# EAGLE board Sensor8535 - eagle (EAGLE 4.09)
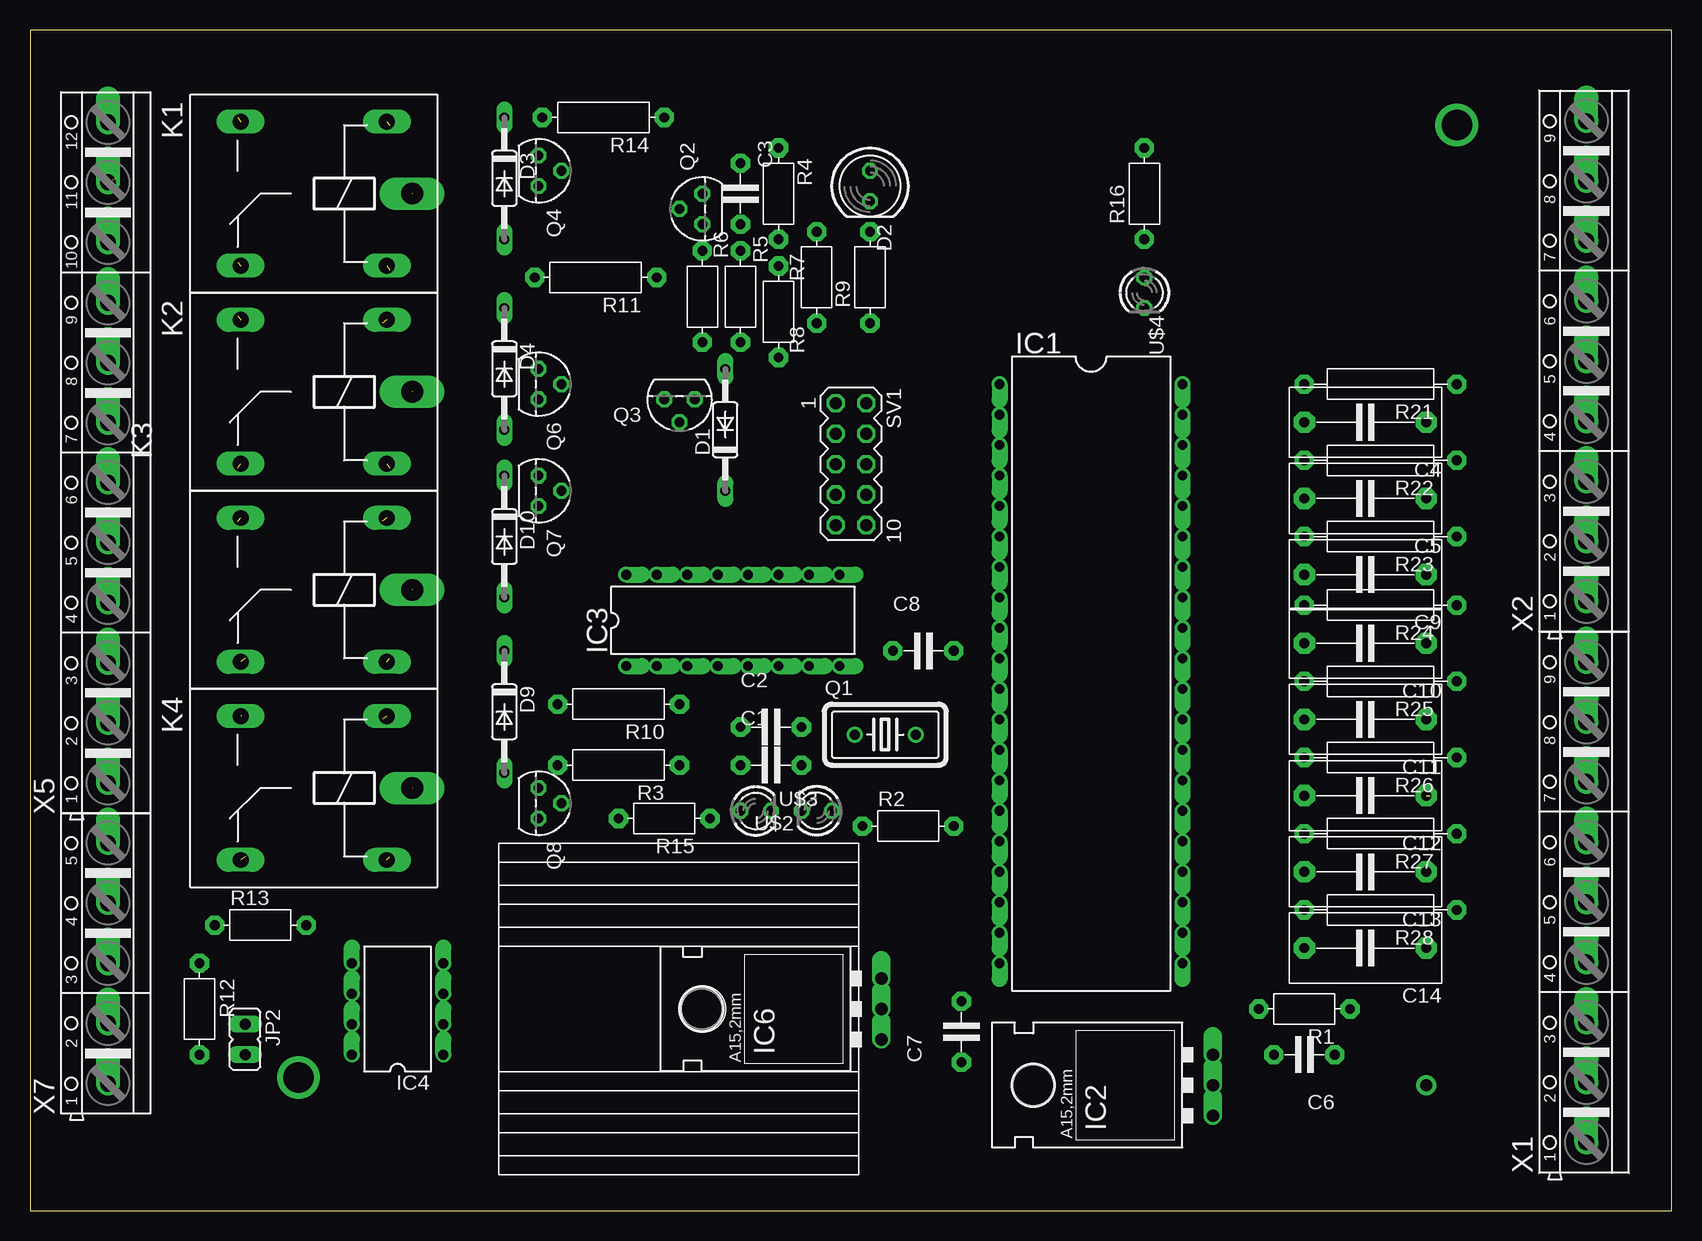
[diagram p0: board, top side]
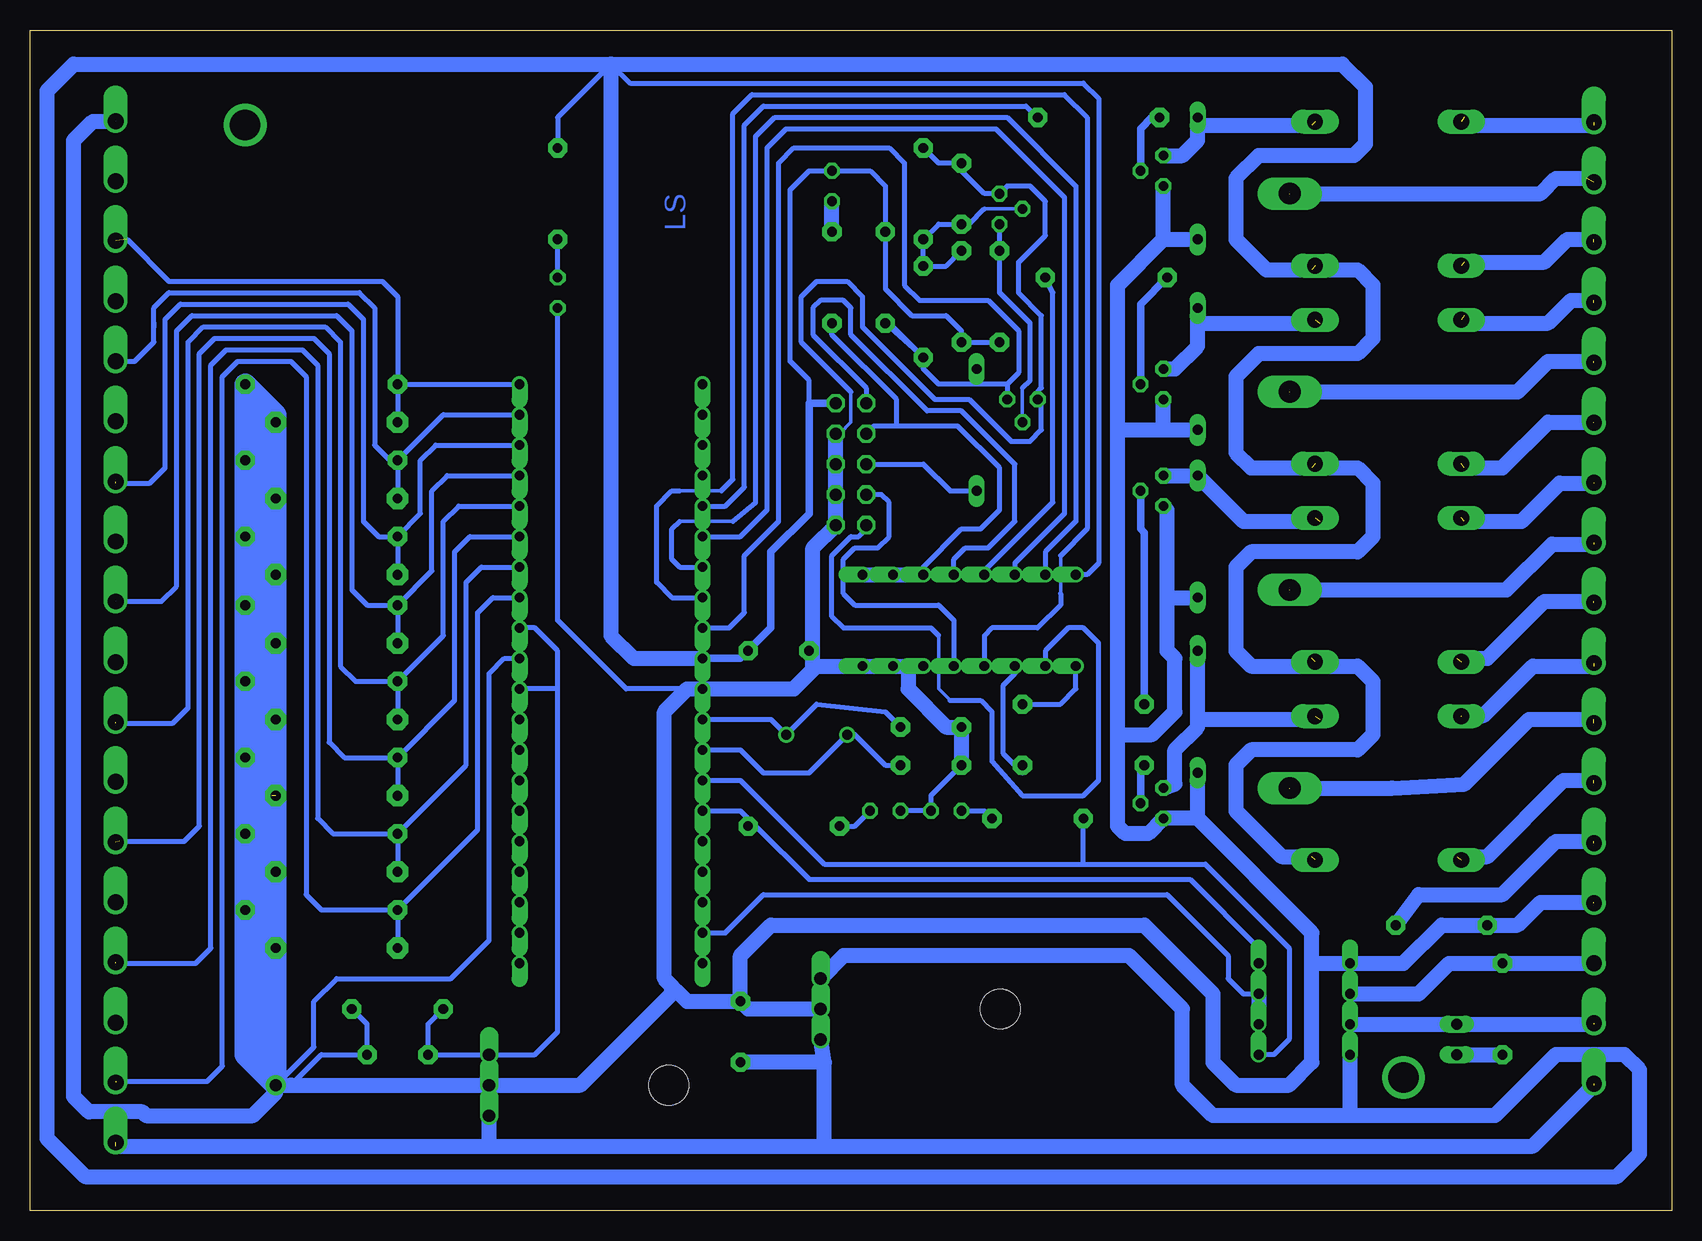
[diagram p1: board, bottom side, seen from below]

Size 136.83 x 98.41 mm. Coordinates in mm from the lower left corner, seen from the top.
Outline: 136.83,0 136.83,98.4 0,98.4 0,0 136.83,0
Copper layers used: Bottom

## Footprints (pad centres in the part's own frame; a part is rotated, then mirrored left to right if it is on the bottom)
C-5 = drill 0.813 pad 1.6 octagon: 1 -2.54,0; 2 2.54,0
C-10 = drill 0.813 pad 1.778 octagon: 1 -5.08,0; 2 5.08,0
DO35-10 = drill 0.813 long: A 5.08,0; C -5.08,0
LED5MM = drill 0.813 octagon: A -1.27,0; K 1.27,0
DIL40 = drill 0.813 offset: 1 -24.13,-7.62; 2 -21.59,-7.62; 3 -19.05,-7.62; 4 -16.51,-7.62; 5 -13.97,-7.62; 6 -11.43,-7.62; 7 -8.89,-7.62; 8 -6.35,-7.62; 9 -3.81,-7.62; 10 -1.27,-7.62; 11 1.27,-7.62; 12 3.81,-7.62; 13 6.35,-7.62; 14 8.89,-7.62; 15 11.43,-7.62; 16 13.97,-7.62; 17 16.51,-7.62; 18 19.05,-7.62; 19 21.59,-7.62; 20 24.13,-7.62; 21 24.13,7.62; 22 21.59,7.62; 23 19.05,7.62; 24 16.51,7.62; 25 13.97,7.62; 26 11.43,7.62; 27 8.89,7.62; 28 6.35,7.62; 29 3.81,7.62; 30 1.27,7.62; 31 -1.27,7.62; 32 -3.81,7.62; 33 -6.35,7.62; 34 -8.89,7.62; 35 -11.43,7.62; 36 -13.97,7.62; 37 -16.51,7.62; 38 -19.05,7.62; 39 -21.59,7.62; 40 -24.13,7.62
78XXL = drill 1.016 offset: GND 0,-3.81; IN -2.54,-3.81; OUT 2.54,-3.81 | hole 3.302: 0,11.176
DIL16 = drill 0.813 offset: 1 -8.89,-3.81; 2 -6.35,-3.81; 3 -3.81,-3.81; 4 -1.27,-3.81; 5 1.27,-3.81; 6 3.81,-3.81; 7 6.35,-3.81; 8 8.89,-3.81; 9 8.89,3.81; 10 6.35,3.81; 11 3.81,3.81; 12 1.27,3.81; 13 -1.27,3.81; 14 -3.81,3.81; 15 -6.35,3.81; 16 -8.89,3.81
DIL08 = drill 0.813 offset: 1 -3.81,-3.81; 2 -1.27,-3.81; 3 1.27,-3.81; 4 3.81,-3.81; 5 3.81,3.81; 6 1.27,3.81; 7 -1.27,3.81; 8 -3.81,3.81
JP1 = drill 0.914 long: 1 0,-1.27; 2 0,1.27
ZF112 = drill 1.321 long: 1 -6.096,5.994; 2 -6.096,-5.994; O 6.096,5.994; S 6.096,-5.994 | drill 1.803 long: P -8.204,0
HC18U-V = drill 0.813 round: 1 -2.54,0; 2 2.54,0
TO92 = drill 0.813 octagon: 1 1.27,0; 2 0,1.905; 3 -1.27,0
R-7,5 = drill 0.813 pad 1.6 octagon: 1 -3.81,0; 2 3.81,0
R-10 = drill 0.813 pad 1.6 octagon: 1 -5.08,0; 2 5.08,0
R-12,5 = drill 0.813 pad 1.6 octagon: 1 -6.35,0; 2 6.35,0
MA05-2 = drill 1.016 octagon: 1 -5.08,-1.27; 2 -5.08,1.27; 3 -2.54,-1.27; 4 -2.54,1.27; 5 0,-1.27; 6 0,1.27; 7 2.54,-1.27; 8 2.54,1.27; 9 5.08,-1.27; 10 5.08,1.27
LED3MM = drill 0.813 octagon: A -1.27,0; K 1.27,0
AK500/9 = drill 1.321 offset: 1 -20.015,0; 2 -15.011,0; 3 -10.033,0; 4 -5.004,0; 5 0,0; 6 5.004,0; 7 10.033,0; 8 15.011,0; 9 20.015,0
AK500/12 = drill 1.321 offset: 1 -27.534,0; 2 -22.53,0; 3 -17.526,0; 4 -12.497,0; 5 -7.493,0; 6 -2.489,0; 7 2.489,0; 8 7.493,0; 9 12.497,0; 10 17.526,0; 11 22.53,0; 12 27.534,0
AK500/5 = drill 1.321 offset: 1 -10.033,0; 2 -5.004,0; 3 0,0; 4 5.004,0; 5 10.008,0

## Placement (x,y rotation side)
C1  27pF  [C-5]  61.75,37.14 0 top
C2  27pF  [C-5]  61.75,40.32 0 top
C3  100nF  [C-5]  59.21,84.77 270 top
C4  [C-10]  111.28,65.72 180 top
C5  [C-10]  111.28,59.37 180 top
C6  100nF  [C-5]  106.2,13.01 180 top
C7  10uFx25V  [C-5]  77.62,14.92 90 top
C8  470nF  [C-5]  74.45,46.67 0 top
C9  [C-10]  111.28,53.02 180 top
C10  [C-10]  111.28,47.3 180 top
C11  [C-10]  111.28,40.95 180 top
C12  [C-10]  111.28,34.6 180 top
C13  [C-10]  111.28,28.25 180 top
C14  [C-10]  111.28,21.9 180 top
D1  1N4148  [DO35-10]  57.94,65.08 90 top
D2  [LED5MM]  70,85.4 270 top
D3  1N4148  [DO35-10]  39.52,86.04 270 top
D4  1N4148  [DO35-10]  39.52,70.16 270 top
D9  1N4148  [DO35-10]  39.52,41.59 270 top
D10  1N4148  [DO35-10]  39.52,56.19 270 top
IC1  AT90S8535P  [DIL40]  88.42,44.76 270 top
IC2  LM78T05  [78XXL]  94.77,10.47 90 top
IC3  4053N  [DIL16]  58.57,49.21 0 top
IC4  MAX481CPA  [DIL08]  30.63,16.82 90 top
IC6  LM340T05  [78XXL]  67.14,16.82 90 top
JP2  [JP1]  17.93,14.28 180 top
K1  ZF112  [ZF112]  23.65,84.77 180 top
K2  ZF112  [ZF112]  23.65,68.26 180 top
K3  ZF112  [ZF112]  23.65,51.75 180 top
K4  ZF112  [ZF112]  23.65,35.24 180 top
Q1  4MHz  [HC18U-V]  71.27,39.68 0 top
Q2  BC337  [TO92]  56.03,83.5 90 top
Q3  BC337  [TO92]  54.13,67.62 180 top
Q4  BC337  [TO92]  42.38,86.67 270 top
Q6  BC337  [TO92]  42.38,68.89 270 top
Q7  BC337  [TO92]  42.38,60 270 top
Q8  BC337  [TO92]  42.38,33.97 270 top
R1  470  [R-7,5]  106.2,16.82 180 top
R2  470  [R-7,5]  73.18,32.06 0 top
R3  [R-10]  49.05,37.14 180 top
R4  6.8k  [R-7,5]  62.38,84.77 90 top
R5  43k  [R-7,5]  59.21,76.19 270 top
R6  10k  [R-7,5]  56.03,76.19 270 top
R7  1M  [R-7,5]  62.38,74.93 90 top
R8  10k  [R-7,5]  65.56,77.78 90 top
R9  150  [R-7,5]  70,77.78 90 top
R10  [R-10]  49.05,42.22 180 top
R11  [R-10]  47.14,77.78 180 top
R12  120  [R-7,5]  14.12,16.82 270 top
R13  100  [R-7,5]  19.2,23.81 0 top
R14  [R-10]  47.78,91.12 180 top
R15  470  [R-7,5]  52.86,32.7 180 top
R16  470  [R-7,5]  92.86,84.77 90 top
R21  [R-12,5]  112.55,68.89 180 top
R22  [R-12,5]  112.55,62.54 180 top
R23  [R-12,5]  112.55,56.19 180 top
R24  [R-12,5]  112.55,50.48 180 top
R25  [R-12,5]  112.55,44.13 180 top
R26  [R-12,5]  112.55,37.78 180 top
R27  [R-12,5]  112.55,31.43 180 top
R28  [R-12,5]  112.55,25.08 180 top
SV1  ISP  [MA05-2]  68.41,62.23 270 top
U$1  [TO-220]  56.03,16.82 90 top
U$2  [LED3MM]  65.56,33.33 180 top
U$3  [LED3MM]  60.48,33.33 0 top
U$4  [LED3MM]  92.86,76.51 270 top
X1  [AK500/9]  129.69,25.71 90 top
X2  [AK500/9]  129.69,70.8 90 top
X5  [AK500/12]  6.5,63.18 90 top
X7  [AK500/5]  6.5,20.63 90 top

## Library data of the parts
C1-C14 R1-R16 R21-R28 = discrete
D1 D3 D4 D9 D10 = diode
D2 U$2-U$4 = led
IC1 = atmel
IC2 IC6 = v-reg
IC3 = 40xx
IC4 = maxim
JP2 = jumper
K1-K4 = relay
Q1 = crystal
Q2-Q4 Q6-Q8 = transistor-npn
SV1 = con-lstb
U$1 = heatsink_brazil
X1 X2 X5 X7 = con-ptr500

## Nets
(MISO)PB6: IC1.7 IC3.15
(MOSI)PB5: IC1.6 IC3.14
(SCK)PB7: IC1.8 IC3.4
+5V: C8.2 D2.A IC1.10 IC3.16 IC4.8 IC6.OUT K1.1 K2.1 K3.1 K4.1 R5.2 R6.2 R8.2 R16.2 SV1.2
A: IC4.6 R12.1 X7.3
ADC0: C4.2 IC1.40 R21.2 X2.7
ADC1: C5.2 IC1.39 R22.2 X2.5
ADC2: C9.2 IC1.38 R23.2 X2.3
ADC3: C10.2 IC1.37 R24.2 X2.1
ADC4: C11.2 IC1.36 R25.2 X1.8
ADC5: C12.2 IC1.35 R26.2 X1.6
ADC6: C13.2 IC1.34 R27.2 X1.4
ADC7: C14.2 IC1.33 R28.2 X1.2
AVCC: C6.2 IC1.30 IC1.32 IC2.OUT R1.2
B: IC4.7 JP2.1 X7.2
CLK1: C1.2 IC1.13 Q1.1
CLK2: C2.2 IC1.12 Q1.2
LED_ENABLE: IC3.9 IC3.10 IC3.11 R9.1 SV1.3
MISO: IC3.2 SV1.9
MOSI: IC3.12 SV1.1
N$1: R13.2 X7.5
N$3: K1.O X5.10
N$4: D3.C K1.2 Q4.3
N$5: D2.K R9.2
N$6: K2.O X5.7
N$7: Q2.3 Q3.2 R6.1
N$8: D4.C K2.2 Q6.3
N$9: C3.2 Q2.2 R4.1 R5.1 R7.2
N$11: JP2.2 R12.2
N$12: D10.C K3.2 Q7.3
N$13: D9.C K4.2 Q8.3
N$14: K3.O X5.4
N$15: Q4.2 R14.2
N$16: Q6.2 R11.2
N$19: Q7.2 R10.2
N$20: Q8.2 R3.2
N$21: K1.S X5.12
N$22: K2.S X5.9
N$23: K3.S X5.6
N$24: K4.S X5.3
N$25: K4.O X5.1
N$26: K4.P X5.2
N$27: K3.P X5.5
N$28: K2.P X5.8
N$29: K1.P X5.11
N$33: R15.1 U$3.A
N$34: R2.1 U$2.A
N$36: R16.1 U$4.A
P-RESET: D1.C SV1.5
PB0: IC1.1
PB1: IC1.2
PB2: IC1.3
PB3: IC1.4
PB4: IC1.5 R14.1
PB5: IC3.13 R11.1
PB6: IC3.1 R10.1
PB7: IC3.3 R3.1
PD0: IC1.14 IC4.1 R15.2
PD1: IC1.15 IC4.4 R2.2
PD2: IC1.16
PD3: IC1.17
PD4: IC1.18
PD5: IC1.19 IC4.2 IC4.3
PD6: IC1.20
PD7: IC1.21
PE: C1.1 C2.1 C3.1 C4.1 C5.1 C6.1 C7.2 C8.1 C9.1 C10.1 C11.1 C12.1 C13.1 C14.1 D3.A D4.A D9.A D10.A IC1.11 IC1.31 IC2.GND IC3.6 IC3.7 IC3.8 IC4.5 IC6.GND Q2.1 Q3.1 Q4.1 Q6.1 Q7.1 Q8.1 R1.1 R4.2 R13.1 R21.1 R22.1 R23.1 R24.1 R25.1 R26.1 R27.1 R28.1 SV1.4 SV1.6 SV1.8 SV1.10 U$2.K U$3.K U$4.K X2.9 X7.4
RST: D1.A IC1.9 Q3.3 R7.1 R8.1
SCK: IC3.5 SV1.7
VCC: C7.1 IC2.IN IC6.IN X1.1 X7.1

## Tracks (layer width: path | path; a pad name or v marks a point on that pad's centre or on a via)
(MISO)PB6
  Bottom 0.305: 82.7,57.46 78.26,57.46
  Bottom 0.406: IC1.7 82.7,53.65 83.34,54.29 83.34,56.83 82.7,57.46 | 78.26,57.46 76.35,59.05 76.35,89.53 74.77,91.12 55.4,91.12 49.68,85.4 49.68,57.46 52.22,54.92 IC3.15
(MOSI)PB5
  Bottom 0.406: IC1.6 77.62,56.19 75.4,58.41 75.4,88.58 73.81,90.16 56.35,90.16 50.64,84.45 50.64,58.1 54.76,53.97 IC3.14
(SCK)PB7
  Bottom 0.305: 82.7,60 79.21,60 | 50.95,54.6 50.95,51.43
  Bottom 0.406: IC1.8 83.34,51.11 84.61,52.38 84.61,58.73 83.34,60 82.7,60 | IC3.4 57.3,47.94 56.67,48.57 52.86,48.57 50.95,50.48 50.95,51.43 | 50.95,54.6 48.73,56.83 48.73,91.12 50.64,93.02 76.67,93.02 78.26,91.43 78.26,60.96 79.21,60
+5V  (4 unrouted)
  Bottom 0.406: R6.2 R5.2 59.21,73.34 60.48,74.61 63.34,74.61 65.56,76.83 R8.2 65.56,85.4 66.83,86.67 D2.A 71.91,86.67 73.5,85.08 73.5,70.8 71.91,69.21 71.91,67.3 | IC3.16 48.73,53.02 47.78,53.97 47.78,92.71 49.05,93.97 86.83,93.97 88.42,95.56 92.86,91.12 R16.2
  Bottom 0.61: IC1.10 77.62,46.03 | 77.62,46.03 75.08,48.57 75.08,54.92 71.91,58.1 71.91,67.3 SV1.2 | 77.62,46.03 C8.2
  Bottom 1.27: 29.36,46.03 30,46.03 30.63,45.4 | 30,61.91 31.27,61.91 | 30,78.42 30.63,78.42 | 30,29.52 32.54,29.52 36.35,33.33 36.35,37.14 35.08,38.41 26.19,38.41 24.92,39.68 24.92,44.13 26.19,45.4 30.63,45.4 | 30.63,45.4 35.08,45.4 36.35,46.67 36.35,53.65 35.08,54.92 26.19,54.92 24.92,56.19 24.92,60.64 26.19,61.91 30,61.91 | 30,61.91 35.08,61.91 36.35,63.18 36.35,69.53 34.44,71.43 26.19,71.43 24.92,72.7 24.92,77.15 26.19,78.42 30,78.42 | 30,78.42 33.81,78.42 36.35,80.96 36.35,86.04 34.44,87.94 26.5,87.94 25.55,88.9 25.55,93.66 27.46,95.56 88.42,95.56 | 26.82,7.93 38.25,7.93 40.79,10.47 40.79,16.82 45.24,21.27 69.05,21.27 IC6.OUT | 26.82,7.93 14.76,7.93 9.68,13.01 3.96,13.01 2.69,11.74 2.69,4.76 4.6,2.85 132.23,2.85 135.41,6.03 135.41,93.34 133.19,95.56 88.42,95.56 | 26.82,7.93 IC4.8 | IC1.10 86.51,46.03 88.42,47.94 88.42,95.56
A
  Bottom 1.27: X7.3 R12.1 18.57,20.63 21.11,18.09 IC4.6
ADC0  (1 unrouted)
  Bottom 0.406: R21.2 IC1.40 | R21.2 C4.2 | R21.2 106.2,76.19 107.47,77.46 125.25,77.46 128.74,80.96
ADC1
  Bottom 0.406: IC1.39 102.39,66.35 R22.2 | R22.2 C5.2 | R22.2 106.83,62.54 108.1,63.81 108.1,75.24 109.37,76.51 125.25,76.51 126.52,75.24 126.52,73.97 | 126.52,73.97 126.52,73.66 | X2.5 128.1,70.8 126.52,72.38 126.52,73.97
ADC2  (1 unrouted)
  Bottom 0.406: IC1.38 103.02,63.81 104.29,62.54 104.29,58.1 R23.2 | R23.2 C9.2 | R23.2 107.78,56.19 109.06,57.46 109.06,74.29 110.32,75.56 124.3,75.56 125.57,74.29 125.57,61.91 126.83,60.64 129.69,60.64
ADC3  (1 unrouted)
  Bottom 0.406: IC1.37 102.07,61.27 103.34,60 103.34,53.33 R24.2 | R24.2 C10.2 | R24.2 108.74,50.48 110.01,51.75 110.01,73.34 111.28,74.61 123.34,74.61 124.61,73.34 124.61,52.07 125.88,50.8 129.69,50.8
ADC4  (1 unrouted)
  Bottom 0.406: IC1.36 101.12,58.73 102.39,57.46 102.39,47.94 R25.2 | R25.2 C11.2 | R25.2 109.69,44.13 110.96,45.4 110.96,72.38 112.23,73.66 122.39,73.66 123.66,72.38 123.66,41.91 124.93,40.63 129.69,40.63
ADC5  (1 unrouted)
  Bottom 0.406: IC1.35 100.17,56.19 101.43,54.92 101.43,42.54 R26.2 | R26.2 C12.2 | R26.2 110.64,37.78 111.91,39.05 111.91,71.43 113.18,72.7 121.44,72.7 122.71,71.43 122.71,32.06 123.98,30.79 129.38,30.79
ADC6  (1 unrouted)
  Bottom 0.406: IC1.34 99.21,53.65 100.48,52.38 100.48,37.14 R27.2 | R27.2 C13.2 | R27.2 111.6,31.43 112.86,32.7 112.86,70.48 114.14,71.75 120.49,71.75 121.75,70.48 121.75,21.9 123.02,20.63 129.69,20.63
ADC7  (1 unrouted)
  Bottom 0.406: IC1.33 98.26,51.11 99.53,49.84 99.53,31.75 R28.2 | R28.2 C14.2 | R28.2 112.55,25.08 113.82,26.35 113.82,69.53 115.09,70.8 119.53,70.8 120.8,69.53 120.8,12.06 122.07,10.79 129.69,10.79
AVCC
  Bottom 0.406: 92.86,43.49 IC1.30 | 92.86,43.49 92.86,46.67 94.77,48.57 IC1.32 | 92.86,43.49 92.86,14.92 94.77,13.01 IC2.OUT C6.2 103.66,15.55 R1.2
B  (1 unrouted)
  Bottom 1.27: IC4.7 JP2.1 6.5,15.55
CLK1
  Bottom 0.406: C1.2 65.56,37.14 68.1,39.68 Q1.1 71.91,36.51 75.72,36.51 77.62,38.41 IC1.13
CLK2
  Bottom 0.406: C2.2 65.56,41.59 71.27,42.22 Q1.2 75.08,40.95 IC1.12
LED_ENABLE
  Bottom 0.406: IC3.11 62.38,53.65 59.21,56.83 57.62,56.83 56.03,58.41 56.03,61.91 59.53,65.4 64.61,65.4 | 64.61,65.4 64.61,67.62 70,73.02 R9.1 | 64.61,65.4 66.51,65.4 SV1.3
  Bottom 0.61: IC3.9 IC3.11
  Bottom 1.27: IC3.11 IC3.10 IC3.9
MISO
  Bottom 0.305: 61.11,47.94 61.11,43.49 60.16,42.54
  Bottom 0.406: 61.11,47.94 61.75,48.57 69.05,48.57 70,49.52 70,54.6 68.41,56.19 67.78,56.19 67.14,56.83 SV1.9 | 60.16,42.54 57.62,42.54 56.67,41.59 56.67,37.46 54.13,34.6 49.05,34.6 47.78,35.87 47.78,47.3 49.05,48.57 50.32,48.57 52.22,46.67 IC3.2
MOSI
  Bottom 0.406: IC3.12 59.84,54.29 58.89,55.24 56.99,55.24 54.76,57.46 54.76,62.22 59.21,66.67 62.06,66.67 68.41,73.02 68.41,75.24 69.05,75.88 70.96,75.88 71.59,75.24 71.59,73.02 67.14,68.57 SV1.1
N$1  (1 unrouted)
  Bottom 1.27: R13.2 21.11,26.35 14.12,26.35 9.68,30.79 6.5,30.79
N$2  (via drill 2.54)
  other vias: 118.9,90.48
N$3  (2 unrouted)
  Bottom 1.27: 6.5,80.96 8.72,80.96 10.63,79.05 17.3,79.05
N$4  (1 unrouted)
  Bottom 1.27: 39.52,90.48 30,90.48 | Q4.3 40.79,87.94 39.52,89.21 39.52,90.48 | 39.52,90.48 D3.C
N$5
  Bottom 1.27: R9.2 D2.K
N$6  (2 unrouted)
  Bottom 1.27: 6.5,65.72 10.31,65.72 14.12,61.91 17.3,61.91
N$7
  Bottom 0.305: Q3.2 54.13,68.57
  Bottom 0.406: Q2.3 R6.1 56.03,76.51 53.49,73.97 53.49,69.21 54.13,68.57
N$8  (1 unrouted)
  Bottom 1.27: 39.52,73.97 29.36,73.97 | Q6.3 41.43,70.16 39.52,72.07 39.52,73.97 | 39.52,73.97 D4.C
N$9
  Bottom 0.305: 57.3,83.5 Q2.2
  Bottom 0.406: R5.1 60.48,78.74 R7.2 R4.1 61.11,82.23 C3.2 58.57,82.23 57.3,83.5
N$11
  Bottom 1.27: JP2.2 R12.2
N$12  (1 unrouted)
  Bottom 1.27: 29.36,57.46 35.71,57.46 D10.C Q7.3
N$13  (1 unrouted)
  Bottom 1.27: 39.52,40.95 29.36,40.95 | Q8.3 41.43,35.55 41.43,38.41 39.52,40.32 39.52,40.95 | 39.52,40.95 D9.C
N$14  (2 unrouted)
  Bottom 1.27: 6.5,50.48 6.5,50.8 10.63,50.8 15.39,46.03 17.93,46.03
N$15
  Bottom 0.61: R14.2 43.33,91.12 44.28,90.16 Q4.2
N$16
  Bottom 0.61: R11.2 44.28,75.56 Q6.2
N$19
  Bottom 0.61: R10.2 43.97,56.51 44.28,56.83 Q7.2
N$20
  Bottom 0.61: Q8.2 44.28,36.82 R3.2
N$21  (2 unrouted)
  Bottom 1.27: 6.5,90.48 16.66,90.48 17.3,91.12
N$22  (2 unrouted)
  Bottom 1.27: 6.5,75.88 8.41,75.88 10.31,73.97 16.66,73.97 17.3,74.61
N$23  (2 unrouted)
  Bottom 1.27: 6.5,60.64 9.36,60.64 12.53,57.46 17.3,57.46
N$24  (2 unrouted)
  Bottom 1.27: 6.5,45.4 11.58,45.4 15.71,41.27 17.61,41.27 17.93,40.95
N$25  (2 unrouted)
  Bottom 1.27: 17.93,29.52 15.39,29.52 9.04,35.87 6.5,35.87
N$26  (2 unrouted)
  Bottom 1.27: 6.5,40.95 11.9,40.95 17.3,35.55 23.33,35.24 31.9,35.24
N$27  (2 unrouted)
  Bottom 1.27: 6.5,55.56 10,55.56 13.81,51.75 31.9,51.75
N$28  (2 unrouted)
  Bottom 1.27: 6.5,70.8 10.31,70.8 12.85,68.26 31.9,68.26
N$29  (2 unrouted)
  Bottom 1.27: 7.14,86.04 9.68,86.04 10.95,84.77 31.9,84.77
N$30
  Bottom 1.778: 117.63,23.81 117.63,66.35
N$31
  Bottom 1.778: 117.63,12.38 117.63,22.54
N$33
  Bottom 0.406: U$3.A 57.3,33.33 R15.1
N$34
  Bottom 0.406: R2.1 68.1,32.06 U$2.A
N$35  (via drill 2.54)
  other vias: 22.38,11.11
N$36
  Bottom 0.406: U$4.A R16.1
P-RESET
  Bottom 0.406: D1.C 60.16,60 62.38,62.22 SV1.5
PB4
  Bottom 0.406: IC1.5 78.89,58.73 77.3,60.32 77.3,90.48 75.72,92.07 53.81,92.07 R14.1
PB5
  Bottom 0.406: IC3.13 57.3,53.33 51.59,59.05 51.59,76.51 R11.1
PB6
  Bottom 0.406: IC3.1 49.68,43.49 50.95,42.22 R10.1
PB7
  Bottom 0.406: R3.1 54.13,36.51 55.72,38.1 55.72,43.81 54.76,44.76 IC3.3
PD0
  Bottom 0.406: IC4.1 33.17,13.01 31.9,14.28 31.9,21.9 38.89,28.89 49.05,28.89 | 49.05,28.89 70.64,28.89 77.62,35.87 IC1.14 | 49.05,28.89 R15.2
PD1
  Bottom 0.406: IC4.4 34.44,21.9 40.16,27.62 71.91,27.62 76.35,32.06 | 76.35,32.06 77.62,33.33 IC1.15 | 76.35,32.06 R2.2
PD5
  Bottom 0.406: IC4.3 35.71,18.09 36.98,19.36 36.98,21.27 42.06,26.35 75.72,26.35 78.89,23.17 IC1.19
  Bottom 1.27: IC4.3 IC4.2
PE  (via drill 1.02 pad 1.68)  (3 unrouted)
  Bottom 0.305: SV1.4 69.37,64.77 68.41,65.72 68.41,68.26
  Bottom 0.406: R4.2 61.11,87.31 C3.1 59.21,86.67 57.3,84.77 Q2.1 55.4,85.4 53.49,85.4 52.22,84.13 52.22,81.27 54.45,79.05 54.45,76.51 52.54,74.61 52.54,68.57 52.86,68.26 Q3.1 52.54,67.3 52.54,65.08 53.49,64.13 55.08,64.13 58.57,67.62 61.43,67.62 67.46,73.66 67.46,76.19 68.73,77.46 71.27,77.46 72.54,76.19 72.54,72.38 68.41,68.26 | IC1.31 97.31,46.03 98.58,44.76 98.58,22.54 101.75,19.36 111.28,19.36 113.18,17.46 113.18,13.65 v116.36,10.47 | C13.1 116.36,28.89 R27.1 118.9,32.38 116.68,34.6 116.68,35.55 R26.1 118.9,38.41 C11.1 116.36,41.59 R25.1 118.9,44.76 C10.1 116.36,47.94 R24.1 C9.1 116.36,53.65 R23.1 118.9,56.83 C5.1 116.36,60 R22.1 118.9,63.18 C4.1 | 115.09,10.47 112.55,13.01 C6.1 108.74,15.55 R1.1 | U$2.K U$3.K 61.75,34.6 C1.1 | U$4.K 92.86,49.21 87.15,43.49 IC1.11
  Bottom 0.61: SV1.6 SV1.4 | 71.59,45.4 71.59,46.35 C8.1
  Bottom 1.27: 63.65,45.4 IC3.7 IC3.8 71.59,45.4 | 63.65,45.4 IC3.6 | SV1.4 SV1.6 SV1.8 SV1.10 | SV1.10 69.68,59.37 | 39.52,32.7 Q8.1 43.65,31.43 45.55,31.43 46.19,32.06 46.19,39.68 | 39.52,32.7 D9.A | 42.38,65.08 D4.A | 42.38,65.08 Q6.1 | 42.38,80.96 D3.A | 42.38,80.96 Q4.1 | 42.38,80.96 46.19,77.15 46.19,65.08 | 46.19,39.68 46.19,65.08 | 46.19,65.08 42.38,65.08 | 46.19,39.68 43.33,39.68 41.43,41.59 41.43,46.03 42.06,46.67 42.06,51.11 | 42.06,51.11 42.06,58.41 Q7.1 | 42.06,51.11 D10.A | C1.1 C2.1 60.48,40.32 63.65,43.49 63.65,45.4 | 6.5,25.71 10.95,25.71 12.85,23.81 R13.1 19.2,23.81 22.38,20.63 IC4.5 30,20.63 | IC6.GND 76.99,16.82 C7.2 | 71.59,45.4 71.59,45.08 73.18,43.49 IC1.11 82.07,43.49 83.97,41.59 83.97,19.36 | 71.59,45.4 71.59,55.24 SV1.10 | 39.52,32.7 30,23.17 30,20.63 | 30,20.63 30,12.38 31.9,10.47 36.35,10.47 38.25,12.38 38.25,18.09 43.97,23.81 75.08,23.81 77.62,21.27 C7.2 | 83.97,19.36 82.07,17.46 C7.2 | 129.69,90.8 131.6,90.8 133.19,89.21 133.19,9.52 131.91,8.25 127.47,8.25 127.15,7.93 118.26,7.93 116.36,9.84 v116.36,10.47 115.09,10.47 99.21,10.47 | 99.21,10.47 IC2.GND | 99.21,10.47 90.96,10.47 83.34,18.09 83.34,18.73 83.97,19.36
  Bottom 1.778: C14.1 C13.1 C11.1 C10.1 C9.1 C5.1 C4.1 116.36,66.35 R21.1 R22.1 R23.1 R24.1 R25.1 R26.1 R27.1 R28.1 | R28.1 118.9,24.44 C14.1 | C14.1 v116.36,10.47 118.9,13.01 R28.1
RST
  Bottom 0.406: R7.1 R8.1 65.24,73.97 R7.1 | 57.94,68.89 D1.A | R7.1 62.38,70.16 61.11,68.89 57.94,68.89 | 55.4,68.89 57.94,68.89 | IC1.9 78.57,48.57 77.3,49.84 77.3,54.6 74.45,57.46 74.45,87.31 73.18,88.58 65.24,88.58 63.97,87.31 63.97,77.15 62.7,75.88 56.99,75.88 54.45,73.34 54.45,69.85 55.4,68.89 | 55.4,68.89 Q3.3
SCK
  Bottom 0.406: IC3.5 59.84,49.21 61.11,50.48 68.1,50.48 69.05,51.43 69.05,54.29 68.1,55.24 66.19,55.24 65.24,56.19 65.24,59.05 65.87,59.68 SV1.7
VCC  (2 unrouted)
  Bottom 1.27: 70.64,12.38 C7.1 | 6.5,10.47 11.58,5.39 70.64,5.39 | 70.64,5.39 70.64,12.38 | 70.64,12.38 IC6.IN | 129.69,5.39 98.58,5.39 | 98.58,5.39 70.64,5.39 | 98.58,5.39 IC2.IN

## Text on the board
Bottom: LS